# Altium PCB Adjustable Led Driver on LM-317 (6 ports).PcbDoc
Units mm, origin at the board's own origin, x right, y up, seen from the top; angles counter-clockwise.
Board outline 152.4 x 101.6 mm, 2 copper layers (Top Layer, Bottom Layer); 15 components, 16 nets, 50 pads, 9 vias.
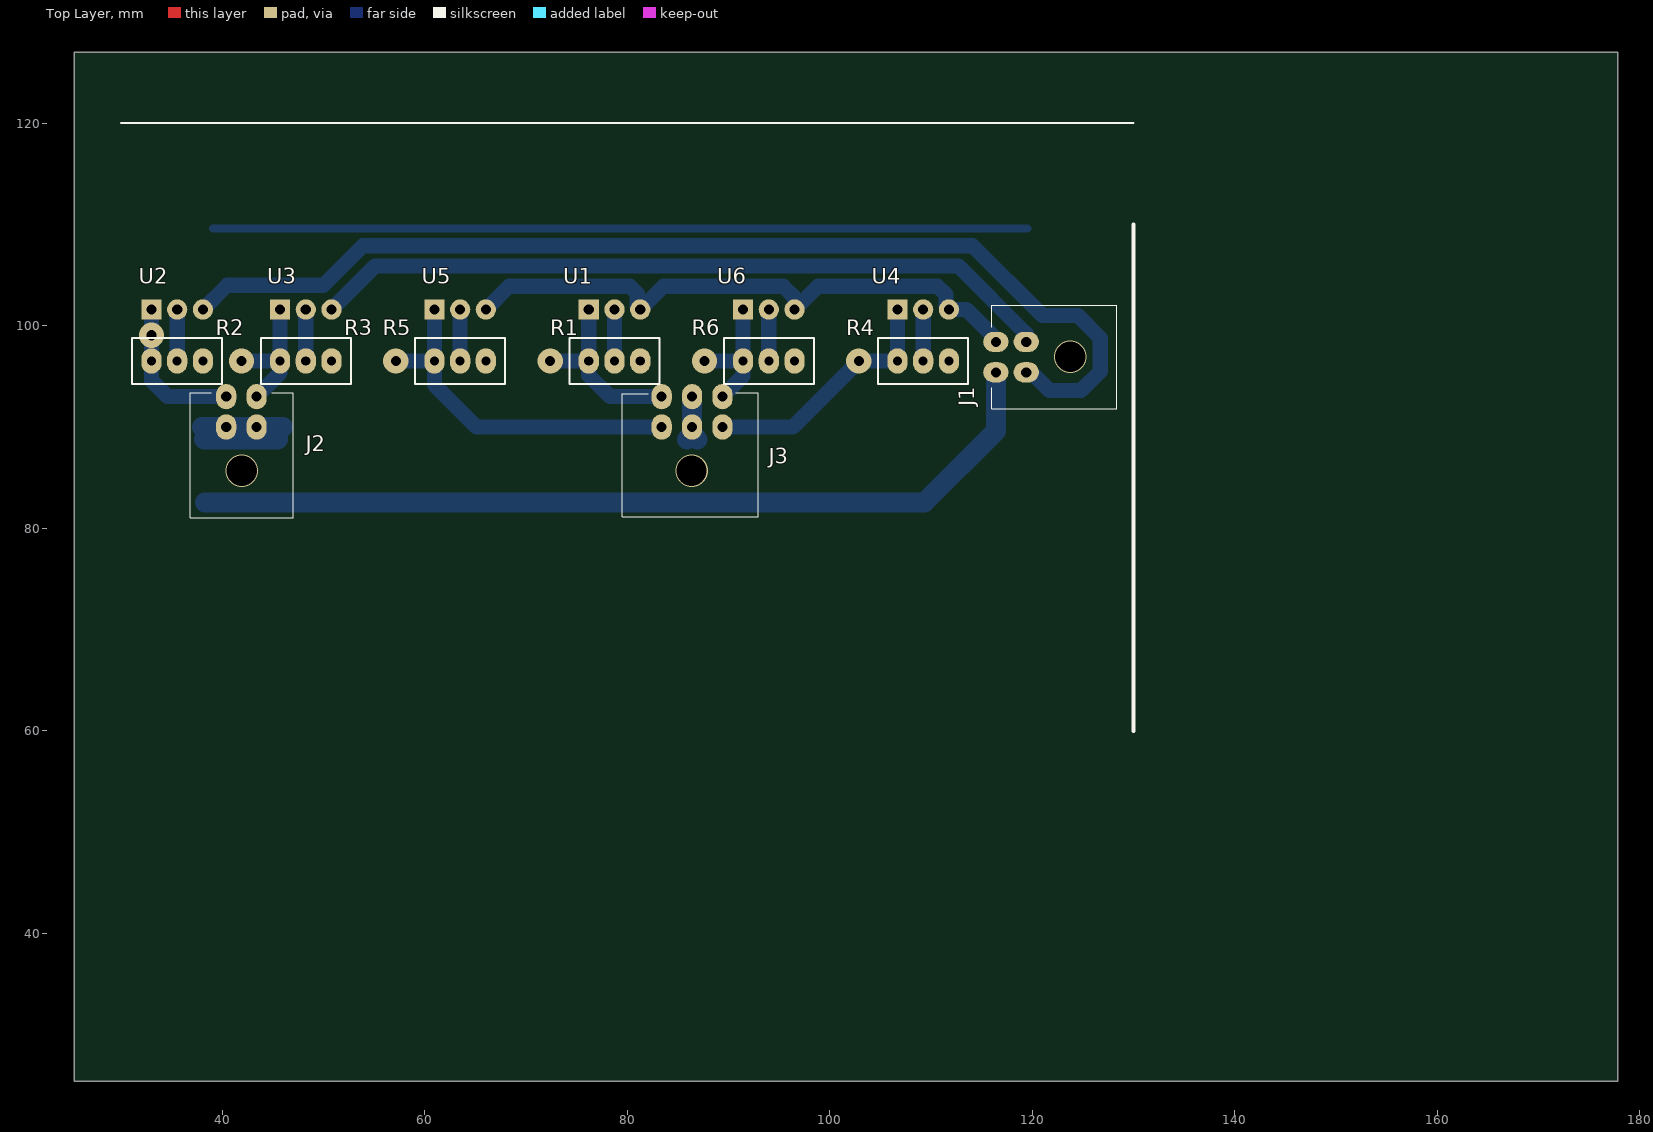
[diagram p0: Top Layer view]
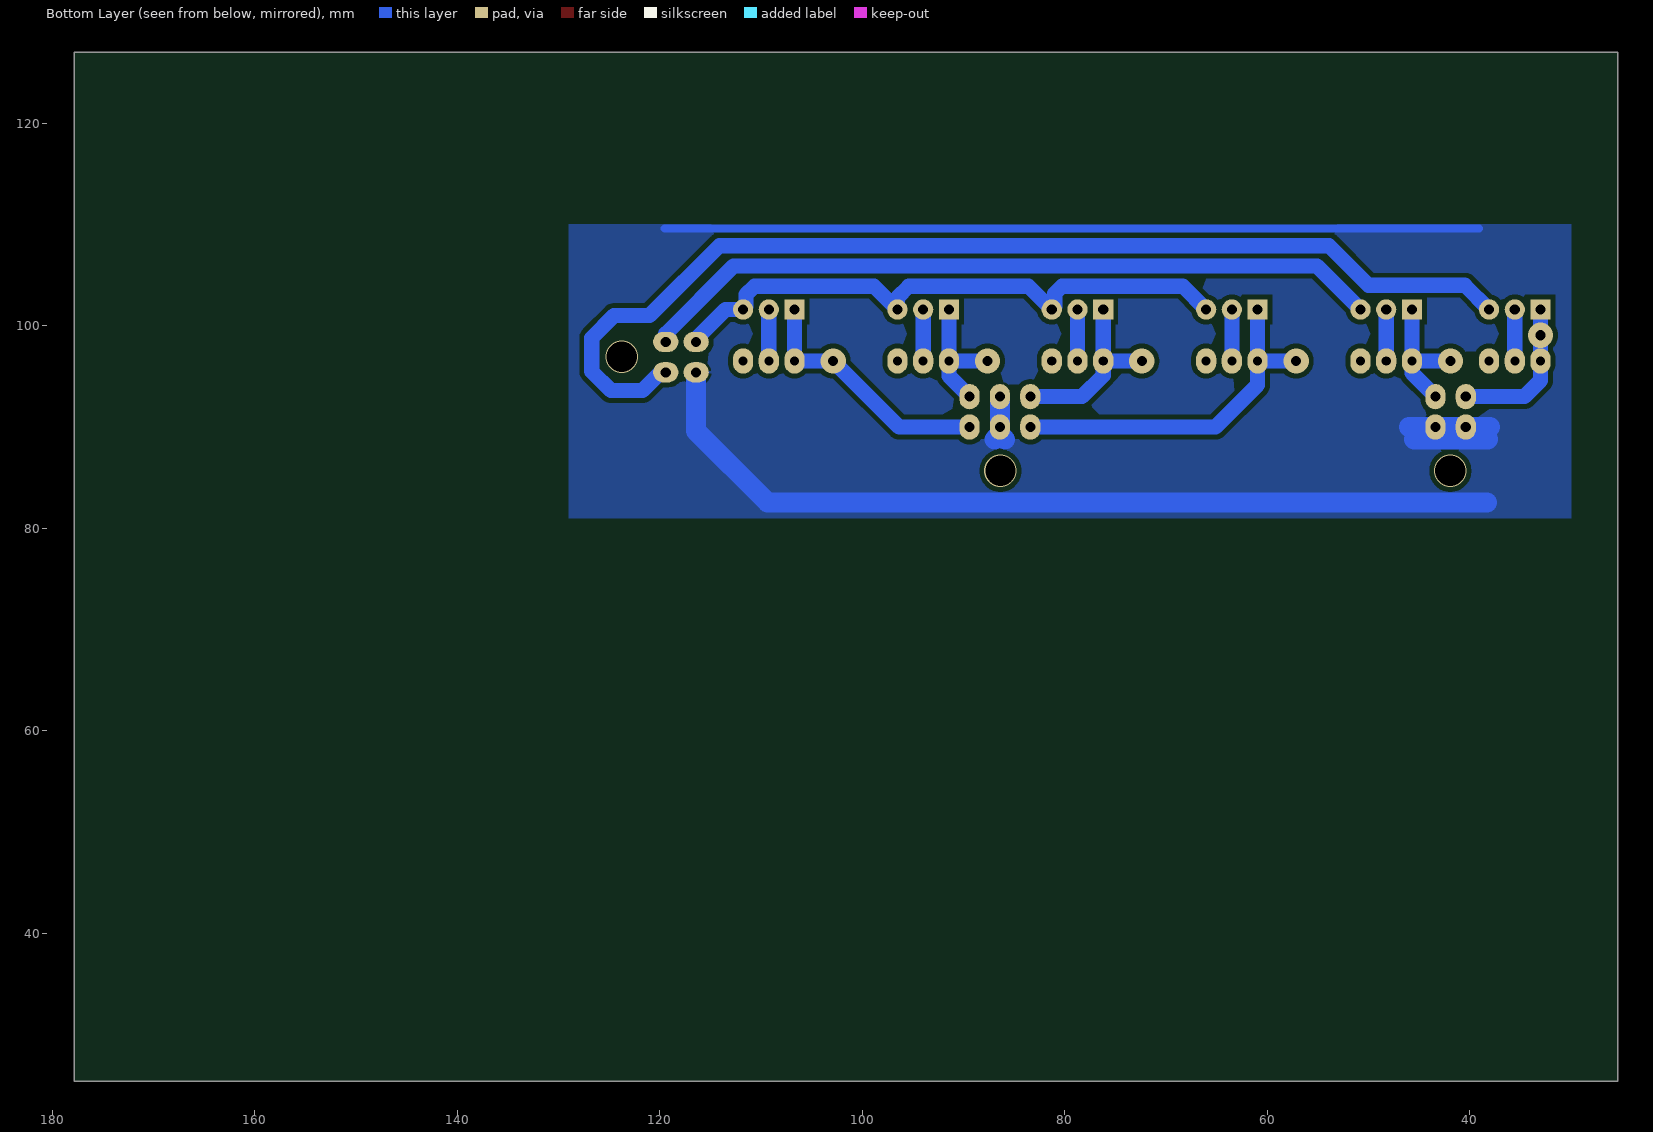
[diagram p1: Bottom Layer view, seen from below]
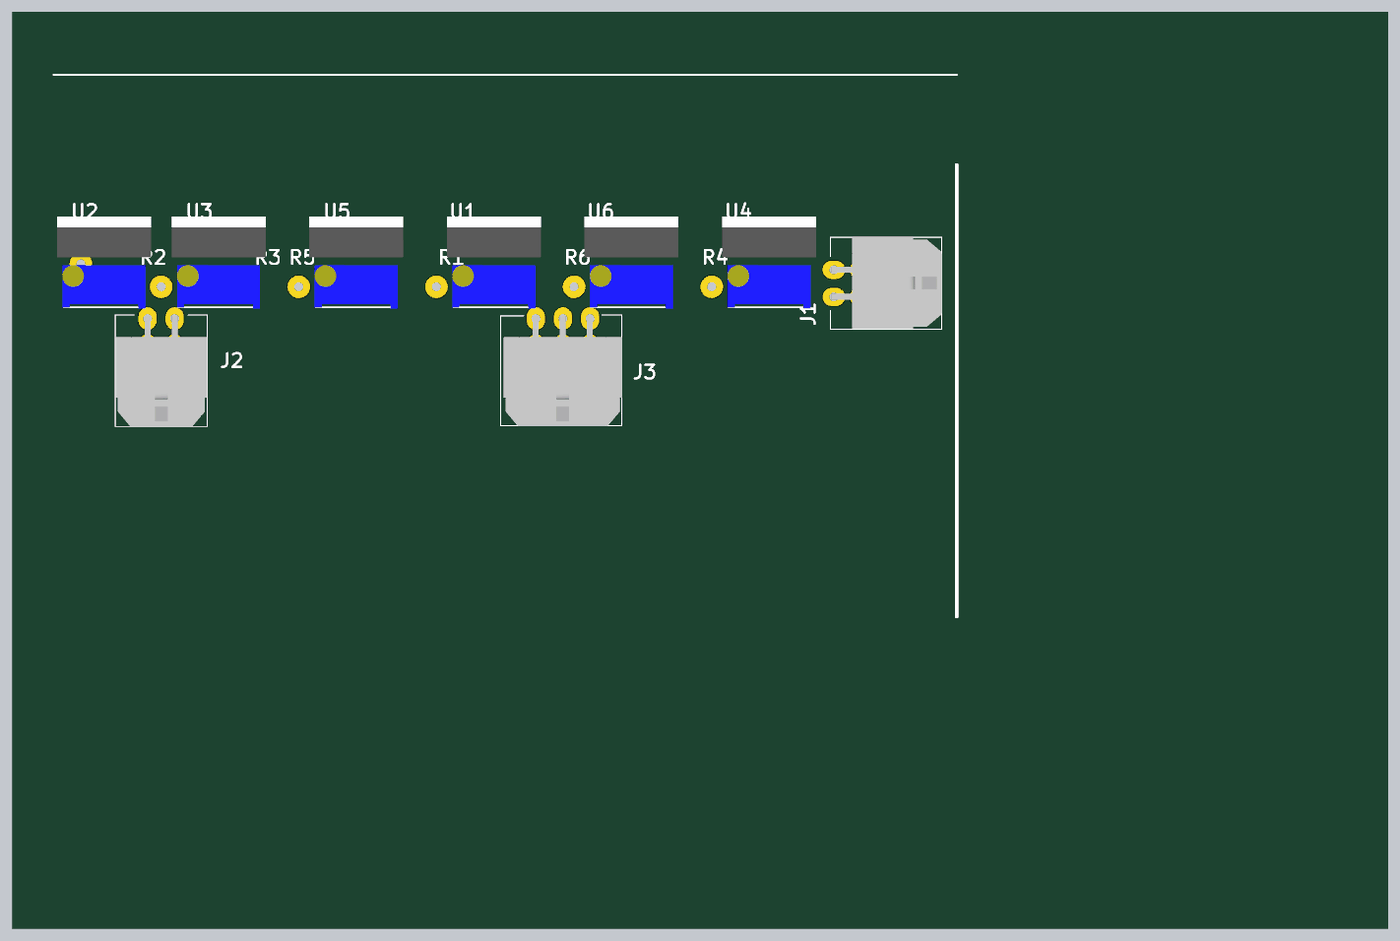
[diagram p2: 3D render of the assembled board from above, using the file's embedded part models]

## Layer stack, top to bottom
Top Solder: solder mask 0.0102, Solder Resist, Dk 3.5
Top Layer: signal copper 0.0356
Dielectric 1: dielectric 0.32, FR-4, Dk 4.8
Bottom Layer: signal copper 0.0356
Bottom Solder: solder mask 0.0102, Solder Resist, Dk 3.5

## Board outline
25.4,25.4 177.8,25.4 177.8,127 25.4,127

## Design rules (kind name [scope] priority, off if disabled: settings)
Clearance [All] p1: gap=0.5
PolygonConnect [All] p1: connectstyle=Relief reliefconductorwidth=0.254 reliefentries=4 polygonreliefangle="90 Angle" airgapwidth=0.254
RoutingVias [All] p1: holewidth=0.711 width=1.27 viastyle="Through Hole" minholewidth=0.711 minwidth=1.27 maxholewidth=0.711 maxwidth=1.27
SolderMaskExpansion [All] p1: expansion=0.102
Width [All] p1: maxlimit=3 minlimit=0.8 preferedwidth=2
29 further rules are at their usual default settings.

## Components (designator, comment, footprint, x,y, rotation, side; value= is the part's Value field where it differs from the comment)
J1 "Input" "Molex Micro-Fit 3.0 - 4 pin D R" 119.4,98.4 r90 top
J2 "Turn" "Molex Micro-Fit 3.0 - 4 pin D R" 43.4,90 r0 top
J3 "Stop" "Molex Micro-Fit 3.0 - 6 pin D R" 89.4,90 r0 top
R1 "КOm" "Res Adj 2.54 X 3" 81.28,96.52 r270 top
R2 "КOm" "Res Adj 2.54 X 3" 38.1,96.52 r270 top
R3 "КOm" "Res Adj 2.54 X 3" 50.8,96.52 r270 top
R4 "КOm" "Res Adj 2.54 X 3" 111.76,96.52 r270 top
R5 "КOm" "Res Adj 2.54 X 3" 66.04,96.52 r270 top
R6 "КOm" "Res Adj 2.54 X 3" 96.52,96.52 r270 top
U1 "" TO220-2 76.2,101.6 r270 top
U2 "" TO220-2 33.02,101.6 r270 top
U3 "" TO220-2 45.72,101.6 r270 top
U4 "" TO220-2 106.68,101.6 r270 top
U5 "" TO220-2 60.96,101.6 r270 top
U6 "" TO220-2 91.44,101.6 r270 top

## Footprints (in the part's own frame and the unit in brackets; to place one, negate y for a bottom-side part, rotate by r counter-clockwise, add the part's x,y. Pads: shape width x height; smd on the part's side, far side on the other; paste and mask are expansions set on the pad)
"Molex Micro-Fit 3.0 - 4 pin D R" [mm]
  oval 2x2.5 hole 1: 1(0,0) 2(-3,0) 3(0,3) 4(-3,3)
  silkscreen extent -6.58,-8.95 3.6,3.4, body extent -6.55,-8.94 3.6,3.3, height 8.83
"Molex Micro-Fit 3.0 - 6 pin D R" [mm]
  oval 2x2.5 hole 1: 1(0,0) 2(-3,0) 3(-6,0) 4(0,3) 5(-3,3) 6(-6,3)
  silkscreen extent -9.9,-8.87 3.52,3.4, body extent -9.6,-8.94 3.55,3.3, height 8.83
"Res Adj 2.54 X 3" [mm]
  oval 2.5x2 hole 0.9: 1(0,0) 2(0,-2.54) 3(0,-5.08)
  silkscreen extent -2.29,-6.98 2.29,1.91, body extent -2.39,-7.14 2.41,2.06, height 12.06
TO220-2 [mm]
  rect 2x2 hole 1: 1(0,0)
  round 2 hole 1: 2(0,2.54) 3(0,5.08)
  body extent -2.7,-2.65 1.8,7.75, height 19

## Part data
J1 J2: library part "Micro-Fit 4R (2x2)", "Horisontal, Dbl line, Male - 3mm"
J3: library part "Micro-Fit 6R (2x3)", "Horisontal, Dbl line, Male - 3mm"
R1 R2 R3 R4 R5 R6: library part "Res Adj 3296"
U1 U2 U3 U4 U5 U6: library part LM-317, "Voltage Regulator"

## Via types
v1: diameter 2.5, hole 1, Top Layer to Bottom Layer, 6 vias
v2: diameter 3.2, hole 3, Top Layer to Bottom Layer, 3 vias

## Nets (pads, with @x,y where several pads share a name; then routed paths per layer and width w, separated by ;. In a path a pad name is that pad's centre, name@x,y a point inside that pad or via, vN(x,y) a via of type N, cw(c..) or ccw(c..) an arc to the next point about the centre after c; other vN are vias at no path point)
GND: J1.4 J2.1 J2.2 J3.2 J3.5 | length 187.7
  Bottom Layer w0.8: 39.1,109.6 119.5,109.6
  Bottom Layer w2: 38,90 J2.2 J2.1 46,90 ; 38.2,88.8 45.5,88.8 ; 38.3,82.55 109.35,82.55 116.4,89.6 J1.4 ; 85.9,88.775 J3.2@86.4,89.275 ; J3.5 J3.2 J3.2@86.4,89.275 ; 86.9,88.775 J3.2@86.4,89.275
NetR1_2: R1.2 U1.2 | length 5.1
  Bottom Layer w1.5: R1.2 U1.2
NetR2_2: R2.2 U2.2 | length 5.1
  Bottom Layer w1.5: R2.2 U2.2
NetR3_2: R3.2 U3.2 | length 5.1
  Bottom Layer w1.5: R3.2 U3.2
NetR4_2: R4.2 U4.2 | length 5.1
  Bottom Layer w1.5: R4.2 U4.2
NetR5_2: R5.2 U5.2 | length 5.1
  Bottom Layer w1.5: R5.2 U5.2
NetR6_2: R6.2 U6.2 | length 5.1
  Bottom Layer w1.5: R6.2 U6.2
STOPSIGNAL_IN: J1.3 U1.3 U4.3 U5.3 U6.3 | length 59.7
  Bottom Layer w1.5: U5.3 68.34,103.9 80.26,103.9 80.99,103.17 80.99,101.89 U1.3 83.58,103.9 95.4,103.9 96.52,102.78 U6.3 98.82,103.9 110.64,103.9 111.47,103.07 111.47,101.89 U4.3 113.5,101.6 116.4,98.7 J1.3
"STOPSIGNAL_OUT 1": J3.6 R1.3 U1.1 | length 18.4
  Bottom Layer w1.5: v1(72.39,96.52) R1.3 ; U1.1 R1.3 ; J3.6 78.3,93 76.2,95.1 R1.3
"STOPSIGNAL_OUT 2": J3.1 R4.3 U4.1 | length 25.1
  Bottom Layer w1.5: J3.1 96.35,90 v1(102.87,96.52) R4.3 U4.1
"STOPSIGNAL_OUT 3": J3.3 R5.3 U5.1 | length 35.4
  Bottom Layer w1.5: v1(57.15,96.52) R5.3 ; U5.1 R5.3 ; J3.3 65.1,90 60.96,94.14 R5.3
"STOPSIGNAL_OUT 4": J3.4 R6.3 U6.1 | length 13.3
  Bottom Layer w1.5: v1(87.63,96.52) R6.3 ; J3.4 91.44,95.04 R6.3 ; U6.1 R6.3
TURNLEFT_IN: J1.1 U3.3 | length 74
  Bottom Layer w1.5: U3.3 55.1,105.9 112.7,105.9 119.4,99.2 J1.1
TURNLEFT_OUT: J2.3 R3.3 U3.1 | length 13.4
  Bottom Layer w1.5: v1(41.91,96.52) R3.3 ; J2.3 45.72,95.32 R3.3 ; U3.1 R3.3
TURNRIGHT_IN: J1.2 U2.3 | length 107.1
  Bottom Layer w1.5: U2.3 40.5,104 50,104 53.9,107.9 114.1,107.9 121,101 124.5,101 126.7,98.8 126.7,95.5 124.8,93.6 121.7,93.6 119.9,95.4 J1.2
TURNRIGHT_OUT: J2.4 R2.3 U2.1 | length 15.1
  Bottom Layer w1.5: U2.1 R2.3 33.02,94.58 34.6,93 J2.4
  other v1: 33.02,99.06
pads on no net: R1.1 R2.1 R3.1 R4.1 R5.1 R6.1
copper on no net:
  other v2: 41.925,85.675 86.35,85.675 123.725,96.925

## Polygon pours and split planes (outlines as drawn)
GND on Bottom Layer "Top Layer-No Net" (solid, pour order 4): 30,110 30,81 129,81 129,110

## Silkscreen, mask and mechanical layers (free items; w line width, h text height)
Top Overlay:
  lines w0.2: 30,120 130,120
  lines w0.4: 130,60 130,110